# EAGLE board 184550 circle (EAGLE 5.10)
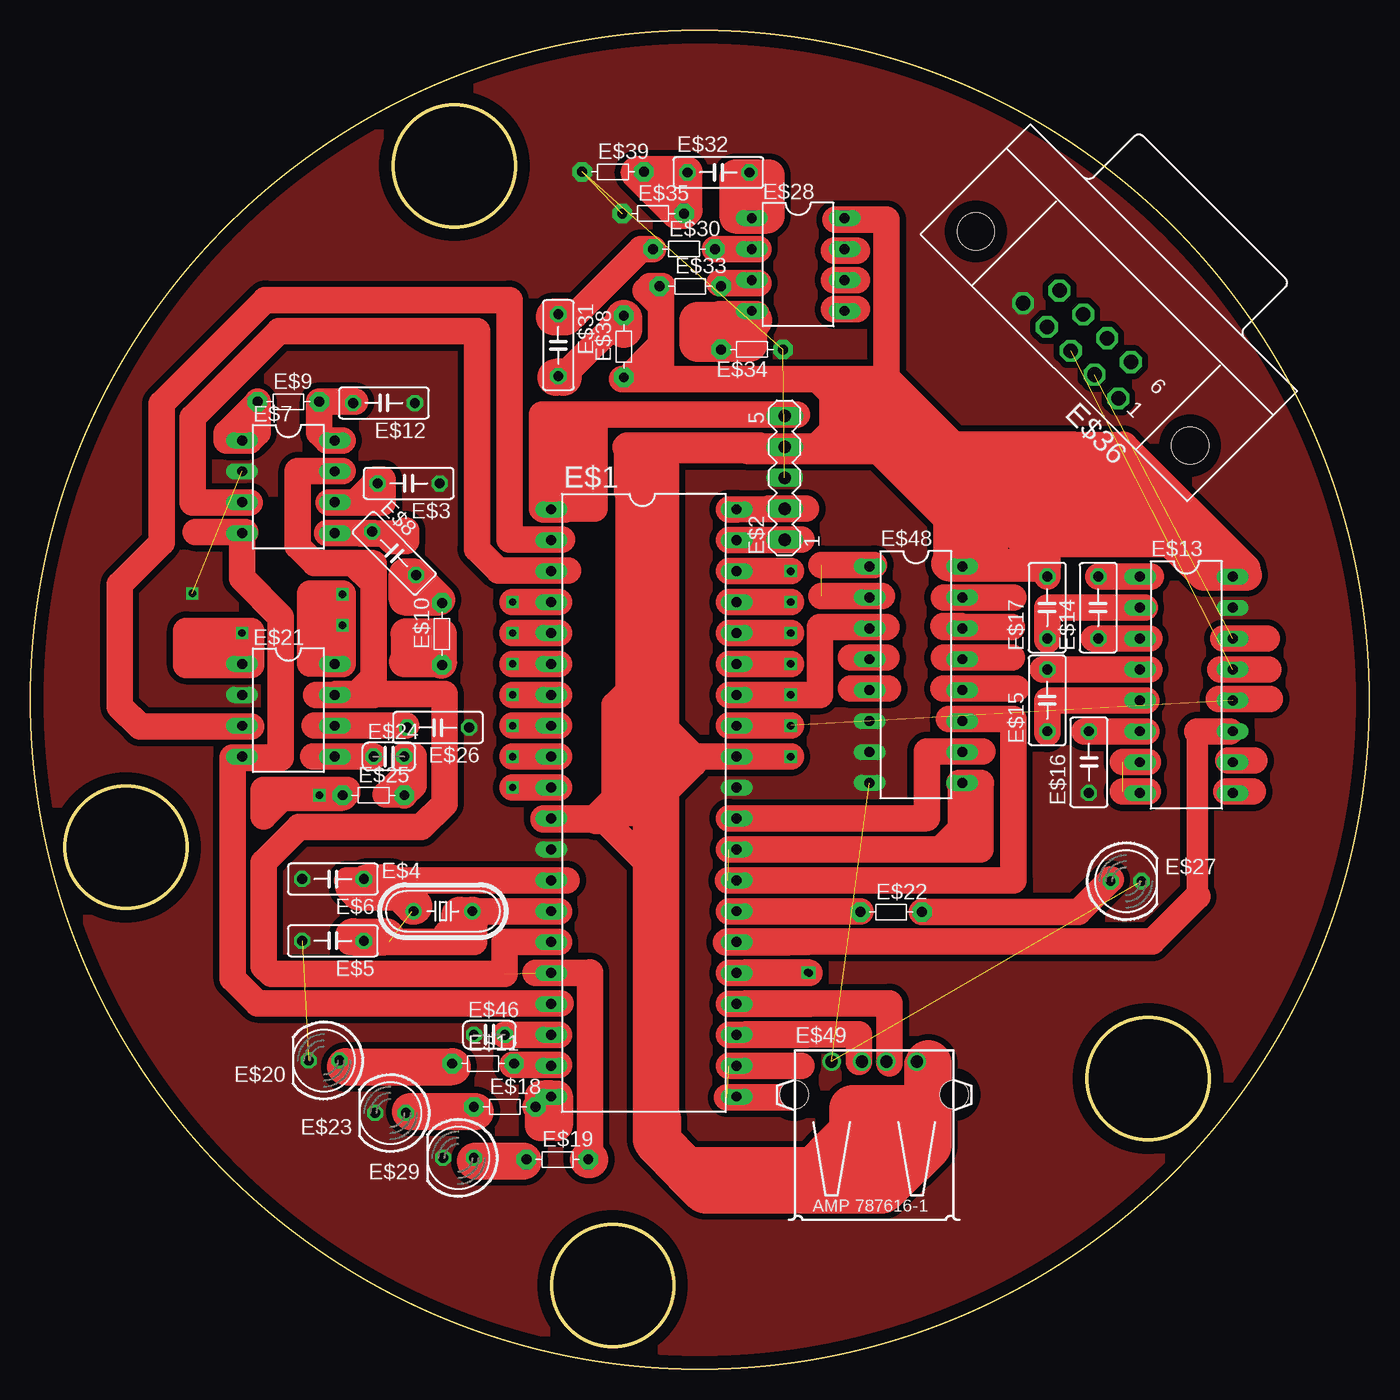
[diagram p0: board, top side]

Size 110 x 110 mm. Coordinates in mm from the lower left corner, seen from the top.
Outline: circle at 55,55 radius 55
Outline: circle at 47.84,6.87 radius 5
Outline: circle at 91.84,23.87 radius 5
Outline: circle at 34.84,98.87 radius 5
Outline: circle at 7.84,42.87 radius 5
Copper layers (1*16): Top 0.035mm / dielectric 1.5mm / Bottom 0.035mm
Design rules "default *": minimum track width 10mil, minimum drill 24mil, track to track 1mil, track to pad 1mil, pad to pad 1mil, via to via 1mil, smd to smd 1mil, copper to edge 40mil, drill to drill 8mil, minimum pad ring 10mil, minimum via ring 8mil, stop-mask expansion 4mil, vias tented up to drill 0mil, thermal gap 10mil

## Footprints (pad centres in the part's own frame; a part is rotated, then mirrored left to right if it is on the bottom)
DIL40 = drill 0.813 long: 1 -24.13,-7.62; 2 -21.59,-7.62; 3 -19.05,-7.62; 4 -16.51,-7.62; 5 -13.97,-7.62; 6 -11.43,-7.62; 7 -8.89,-7.62; 8 -6.35,-7.62; 9 -3.81,-7.62; 10 -1.27,-7.62; 11 1.27,-7.62; 12 3.81,-7.62; 13 6.35,-7.62; 14 8.89,-7.62; 15 11.43,-7.62; 16 13.97,-7.62; 17 16.51,-7.62; 18 19.05,-7.62; 19 21.59,-7.62; 20 24.13,-7.62; 21 24.13,7.62; 22 21.59,7.62; 23 19.05,7.62; 24 16.51,7.62; 25 13.97,7.62; 26 11.43,7.62; 27 8.89,7.62; 28 6.35,7.62; 29 3.81,7.62; 30 1.27,7.62; 31 -1.27,7.62; 32 -3.81,7.62; 33 -6.35,7.62; 34 -8.89,7.62; 35 -11.43,7.62; 36 -13.97,7.62; 37 -16.51,7.62; 38 -19.05,7.62; 39 -21.59,7.62; 40 -24.13,7.62
MA05-1 = drill 1.016 long: 1 -5.08,0; 2 -2.54,0; 3 0,0; 4 2.54,0; 5 5.08,0
C050-025X075 = drill 0.813 octagon: 1 -2.54,0; 2 2.54,0
HC49/S = drill 0.813 round: 1 -2.413,0; 2 2.413,0
DIL08 = drill 0.813 long: 1 -3.81,-3.81; 2 -1.27,-3.81; 3 1.27,-3.81; 4 3.81,-3.81; 5 3.81,3.81; 6 1.27,3.81; 7 -1.27,3.81; 8 -3.81,3.81
R-5 = drill 0.813 pad 1.6 octagon: 1 -2.54,0; 2 2.54,0
DIL16 = drill 0.813 long: 1 -8.89,-3.81; 2 -6.35,-3.81; 3 -3.81,-3.81; 4 -1.27,-3.81; 5 1.27,-3.81; 6 3.81,-3.81; 7 6.35,-3.81; 8 8.89,-3.81; 9 8.89,3.81; 10 6.35,3.81; 11 3.81,3.81; 12 1.27,3.81; 13 -1.27,3.81; 14 -3.81,3.81; 15 -6.35,3.81; 16 -8.89,3.81
C050-030X075 = drill 0.813 octagon: 1 -2.54,0; 2 2.54,0
LED5MM = drill 0.813 octagon: A -1.27,0; K 1.27,0
C025-024X044 = drill 0.813 octagon: 1 -1.27,0; 2 1.27,0
182-009-MALE = drill 1.194 pad 1.524 octagon: 1 -5.537,10.923; 2 -2.769,10.923; 3 0,10.923; 4 2.769,10.923; 5 5.537,10.923; 6 -4.153,8.08; 7 -1.384,8.08; 8 1.384,8.08; 9 4.153,8.08 | hole 3.048: -12.446,9.501; 12.446,9.501
USB = drill 1 round: 1 -3.5,12.99; 2 -1,12.99; 3 1,12.99; 4 3.5,12.99 | hole 2.3: -6.57,10.28; 6.57,10.28

## Placement (x,y rotation side)
E$1  [DIL40]  50.41,46.52 270 top
E$2  [MA05-1]  61.97,73.24 90 top
E$3  [C050-025X075]  31.08,72.78 180 top
E$4  [HC49/S]  33.9,37.63 0 top
E$5  [C050-025X075]  24.86,35.19 180 top
E$6  [C050-025X075]  24.86,40.27 180 top
E$7  [DIL08]  21.2,72.5 270 top
E$8  [C050-025X075]  29.89,67.04 315 top
E$9  [R-5]  21.2,79.49 0 top
E$10  [R-5]  33.82,60.41 90 top
E$11  [R-5]  37.2,25.1 0 top
E$12  [C050-025X075]  29.05,79.38 180 top
E$13  [DIL16]  94.99,56.22 270 top
E$14  [C050-030X075]  87.75,62.57 90 top
E$15  [C050-030X075]  83.56,54.95 90 top
E$16  [C050-030X075]  86.99,49.87 90 top
E$17  [C050-030X075]  83.56,62.57 90 top
E$18  [R-5]  38.98,21.55 0 top
E$19  [R-5]  43.3,17.23 0 top
E$20  [LED5MM]  24.12,25.36 180 top
E$21  [DIL08]  21.2,54.14 270 top
E$22  [R-5]  70.73,37.55 0 top
E$23  [LED5MM]  29.58,21.04 180 top
E$24  [C025-024X044]  29.45,50.33 0 top
E$25  [R-5]  28.18,47.15 0 top
E$26  [C050-025X075]  33.49,52.71 180 top
E$27  [LED5MM]  90.03,40.09 0 top
E$28  [DIL08]  63.08,90.76 270 top
E$29  [LED5MM]  35.17,17.36 180 top
E$30  [R-5]  53.71,92.03 0 top
E$31  [C050-025X075]  43.37,84.13 270 top
E$32  [C050-025X075]  56.53,98.33 0 top
E$33  [R-5]  54.22,88.98 0 top
E$34  [R-5]  59.3,83.78 180 top
E$35  [R-5]  51.17,94.95 0 top
E$36  [182-009-MALE]  93.21,91.4 135 top
E$38  [R-5]  48.76,84.03 90 top
E$39  [R-5]  47.87,98.38 0 top
E$46  [C025-024X044]  37.71,27.47 0 top
E$48  [DIL16]  72.76,57.06 270 top
E$49  [USB]  69.33,12.28 0 top

## Library data of the parts
E$1 = 74xx-eu
E$2 = con-lstb
E$3 E$5 E$6 E$8 E$12 E$14-E$17 E$24 E$26 E$31 E$32 E$46 = rcl
E$4 = crystal
E$7 E$13 E$21 E$28 E$48 = 40xx
E$9-E$11 E$18 E$19 E$22 E$25 E$30 E$33-E$35 E$38 E$39 = discrete
E$20 E$23 E$27 E$29 = led
E$36 = con-subd
E$49 = con-amp

## Nets
GND: E$1.12 E$1.31 E$2.3 E$3.1 E$5.2 E$6.2 E$7.2 E$12.1 E$13.15 E$16.1 E$20.K E$21.2 E$23.K E$26.1 E$27.K E$29.K E$34.1 E$35.1 E$36.5 E$39.1 E$46.1 E$48.6 E$48.7 E$48.8 E$49.1
S$3: E$1.39
S$4: E$1.40
S$7: E$9.1
S$13: E$7.8 E$9.2
S$30: E$24.1
S$31: E$24.2 E$25.2
S$32: E$21.8
S$35: E$1.23
S$36: E$1.24
S$39: E$1.33 E$13.12
S$46: E$25.1
S$59: E$14.2
S$75: E$22.2
S$84: E$11.1
S$96: E$19.2
S$97: E$18.2
S$116: E$35.2
S$121: E$30.1
S$126: E$30.2
S$127: E$34.2
S$141: E$7.4
S$150: E$13.14 E$36.2
S$151: E$13.13 E$36.3

## Tracks (layer width: path | path; a pad name or v marks a point on that pad's centre or on a via)
GND  (via drill 0.6)  (7 unrouted)
  other vias: 13.3,63.74
  pour Top (isolate 0.5, no thermals): -5.72,99.4 -3.31,101.81 8.88,101.81 38.85,131.78 123.56,131.78 128.64,126.7 128.64,21.93 122.55,15.83 99.43,15.83 81.65,-1.95 12.69,-1.95 10.79,-0.04 10.79,8.72 -3.82,23.33 -3.82,45.42
S$1
  Top 2.184: 42.15,70.65 43.93,70.65
S$2
  Top 2.184: 27.04,71.2 28.57,72.73 | 26.66,71.2 27.04,71.2 | 27.04,71.2 28.95,71.2 28.95,73.11 28.31,73.11 28.31,72.86 26.66,71.2 | 24.5,71.2 26.66,71.2
  Top 2.54: 28.57,72.73 28.57,72.86
S$3
  Top 2.184: 62.47,68.13 E$1.39 57.39,68.11
S$4
  Top 2.184: 62.47,70.67 E$1.40 57.39,70.65
S$5  (via drill 0.6)
  Top 2.184: 57.39,32.55 v64,32.55
S$6  (1 unrouted)
  Top 2.184: 31.36,40.17 44.06,40.17 | 31.36,40.17 31.36,37.63 | 31.36,40.17 29.2,40.17 28.18,40.17 26.03,40.17 | 26.28,35.09 29.45,35.09
S$7
  Top 2.184: 16.12,76.31 18.02,76.31 18.66,76.94 E$9.1
S$8  (1 unrouted)
  Top 2.184: 28.06,55.46 34.03,55.46 34.03,46.44 32.12,44.53 22.09,44.53 19.17,41.61 19.17,33.1 19.8,32.47 38.98,32.47 38.98,35.09 43.42,35.09 | 45.96,19.85 45.96,32.55 41.52,32.55
S$9  (via drill 0.6)
  Top 2.184: v39.61,63.03 43.42,63.03
S$10  (via drill 0.6)
  other vias: 25.64,61.12
S$11
  Top 2.184: 24.37,68.69 28.18,68.69
S$12
  Top 2.54: 31.87,58.25 33.77,58.25 | 31.87,58.25 30.85,58.25 30.85,60.41 33.77,60.41 33.77,58.12 | 33.77,58.12 33.77,58 | 31.87,58.25 30.72,58.12 30.85,58.12 | 30.85,58.12 33.77,58.12 | 30.85,58.12 30.98,58.25 30.98,58.76
S$13
  Top 2.184: 25.64,76.31 E$7.8 24.37,76.31 23.74,76.94 E$9.2 26.66,79.48
S$14  (via drill 0.6)
  other vias: 25.64,63.66
S$15
  Top 2.184: 28.18,35.09 36.44,35.09 36.44,37.63 43.42,37.63
S$16  (via drill 0.6)
  Top 2.184: v39.61,50.33 43.42,50.33
S$17
  Top 2.184: 44.19,65.62 38.47,65.62 36.69,67.4 36.69,85.3 20.44,85.3 13.33,78.19 13.33,71.2 18.02,71.2
S$18
  Top 2.184: 43.68,68.16 39.36,68.16 39.36,87.84 19.29,87.84 10.79,79.33 10.79,67.9 7.36,64.47 7.36,54.44 9.01,52.79 18.15,52.79
S$19  (via drill 0.6)
  Top 2.184: v39.61,60.49 43.42,60.49
S$20  (via drill 0.6)
  Top 2.184: v39.61,55.41 43.42,55.41
S$21  (via drill 0.6)
  Top 2.184: v39.61,52.87 43.42,52.87
S$22
  Top 2.184: 13.58,68.79 17.64,68.79
S$23
  Top 2.184: 42.03,70.7 42.03,78.44 62.98,78.44
S$24
  Top 2.184: 80.79,53.32 80.79,40.14 70.45,40.14
S$25
  Top 2.184: 18.15,58 18.15,60.66 12.82,60.66 12.82,58 | 12.82,58 17.52,58 17.52,59.39 13.2,59.39 | 12.82,58 12.82,57.87 18.15,57.87 18.15,58.38 18.02,58.38
S$26
  Top 2.184: 57.14,35.06 62.22,35.06
S$27  (1 unrouted)
  Top 2.184: 78.07,48.17 78.07,42.71 57.42,42.71 | 57.32,40.14 72.51,40.14
S$28
  Top 2.184: 23.36,52.87 30.85,52.87
S$29
  Top 2.184: 16.12,57.95 17.39,57.95 | 17.39,57.95 18.02,57.95 | 17.39,57.95 17.39,60.49
S$30
  Top 2.184: 23.23,50.33 E$24.1
S$31
  Top 2.184: E$25.2 30.72,47.2 | 30.72,47.2 E$24.2 | 30.72,47.2 31.49,47.96 31.49,50.38 30.72,50.38 30.72,49.49 30.85,49.36
S$32
  Top 2.184: 25.64,63.66 25.64,57.95 E$21.8 24.37,57.95
S$33
  Top 2.54: 31.11,63.2 33.27,63.2 | 31.11,63.2 31.11,65.36 | 33.27,63.2 31.11,65.36 | 33.27,63.2 33.65,63.2 31.49,65.36 31.11,65.36 | 31.11,63.2 30.72,63.2 30.72,65.36 30.98,65.36
S$34  (1 unrouted)
  Top 2.184: 57.39,24.93 63.36,24.93 | 57.24,22.31 62.32,22.31
S$35
  Top 2.184: 57.39,27.47 E$1.23 63.74,27.47
S$36
  Top 2.184: 57.39,30.01 E$1.24 64,30.01
S$37  (via drill 0.6)
  Top 2.184: v39.61,47.79 43.42,47.79
S$38  (via drill 0.6)
  Top 2.184: 57.39,65.57 v62.47,65.57
S$39  (via drill 0.6)  (1 unrouted)
  Top 2.184: 57.39,52.87 v62.47,52.87 E$1.33
S$40  (via drill 0.6)
  Top 2.184: 57.39,55.41 v62.47,55.41 64.89,55.41 64.89,60.99
S$41  (via drill 0.6)
  Top 2.184: 57.39,57.95 v62.47,57.95
S$42  (via drill 0.6)
  Top 2.184: 57.39,60.49 v62.47,60.49
S$43  (via drill 0.6)
  Top 2.184: 57.39,63.03 v62.47,63.03
S$44  (via drill 0.6)
  Top 2.184: 62.6,75.73 51.55,75.73 51.68,50.33 | 51.68,50.33 v62.47,50.33 | 51.68,50.33 46.6,45.25 42.15,45.25
S$45  (via drill 0.6)
  other vias: 17.39,60.49
S$46  (via drill 0.6)
  Top 2.54: v23.74,47.15 E$25.1
S$47
  Top 2.184: 76.32,48.17 78.1,48.17
S$48
  Top 2.184: 67.43,55.91 70.48,55.91
S$49
  Top 2.184: 27.17,68.66 29.07,68.66 29.71,68.03 30.85,68.03 30.85,68.92 30.6,68.66 29.2,68.66
S$50
  Top 2.184: 43.55,30.06 18.66,30.06 16.63,32.09 16.63,50.25 19.68,50.25
S$51
  Top 2.184: 26.03,47.33 26.03,47.58 24.37,47.58 | 21.33,47.58 19.17,47.58 19.17,45.42 20.69,46.95 | 20.69,46.95 21.33,47.58 | 21.33,47.58 24.37,47.58 | 24.37,47.58 25.01,46.95 20.69,46.95
S$52
  Top 2.184: 59.43,27.52 63.87,27.52
S$53  (via drill 0.6)
  Top 2.184: 58.79,32.6 v63.87,32.6
S$54
  Top 2.184: 59.43,30.06 63.87,30.06
S$55
  Top 2.184: 70.6,25.1 70.6,30.06 58.79,30.06
S$56
  Top 2.184: 68.06,25.23 68.06,27.52 58.79,27.52
S$57
  Top 2.54: 76.32,66.12 83.3,66.12 83.43,66 75.43,66 75.3,66.12
S$58
  Top 2.184: 72.13,18.5 72.13,18.63
S$59
  Top 2.184: E$14.2 92.07,65.11
S$60
  Top 2.184: 87.37,60.03 91.94,60.03
S$61
  Top 2.184: 83.18,57.49 91.94,57.49
S$62
  Top 2.184: 91.69,54.95 83.56,54.95 83.56,52.28
S$63
  Top 2.184: 86.6,52.41 91.69,52.41
S$64
  Top 2.184: 91.56,62.57 83.56,62.57 83.56,59.9
S$65
  Top 2.184: 72.89,25.1 72.89,17.1 52.19,17.1
S$66
  Top 2.184: 48.89,75.78 62.6,75.78
S$67
  Top 2.184: 97.78,57.49 101.72,57.49
S$68
  Top 2.184: 101.84,55.08 97.65,55.08
S$69
  Top 2.184: 98.03,60.03 101.59,60.03
S$70
  Top 2.184: 98.42,50 100.57,50
S$71
  Top 2.184: 97.65,65.11 97.65,67.78 83.56,67.78 83.56,65.11
S$72
  Top 3.81: 72.38,16.98 73.78,18.37 73.78,25.1
S$73
  Top 2.184: 60.14,35.09 63.8,35.09
S$74
  Top 2.184: 39.61,24.98 43.42,24.98
S$75
  Top 2.184: E$22.2 86.1,37.55 88.76,40.22
S$76
  Top 2.184: 76.19,55.91 81.02,55.91
S$77
  Top 2.54: 99.94,65.24 96.38,65.24 93.46,68.16
S$78
  Top 2.184: 76.44,61.04 75.02,61.04
S$79
  Top 2.184: 50.79,41.49 50.79,19.52 53.84,16.34 52.95,17.36 | 50.79,41.49 50.79,48.09 | 47.23,45.04 46.47,45.04 | 50.79,41.49 47.23,45.04 | 47.23,45.04 47.11,45.17 46.22,45.17 | 46.22,45.17 42.15,45.17 | 46.22,45.17 48,46.95 48,54.57 49.39,55.96 49.39,55.46 54.47,50.38 54.47,49.74 51.55,46.82
  Top 3.81: 51.43,20.66 51.43,74.13 | 51.43,20.66 51.43,18.88 53.84,16.34 | 53.84,16.34 64.63,16.34 | 64.63,16.34 72.38,17.48 72.38,17.1 69.97,14.69 55.49,14.69 53.84,16.34 | 53.84,16.34 51.55,18.63 51.55,20.53 51.43,20.66 | 67.56,19.52 73.14,20.28 | 67.56,19.52 63.24,15.2 64.63,16.34 | 72.38,21.42 67.56,21.42 67.56,19.52
S$80
  Top 2.184: 76.5,55.94 75.02,55.91
S$81
  Top 2.184: 16.14,76.36 16.14,76.92 18.63,79.41
S$82  (via drill 0.6)
  Top 2.184: 57.39,37.63 v68.19,37.63
S$83
  Top 2.184: 16.75,50.2 20.56,50.2 20.56,61.81 17.39,64.98
S$84
  Top 2.184: 25.77,25.1 E$11.1
S$85
  Top 2.184: 38.98,27.47 43.42,27.47
S$86  (via drill 0.6)
  other vias: 39.74,25.1
S$87  (1 unrouted)
  Top 2.184: 89.78,49.87 91.81,49.87 | 89.78,47.46 91.81,47.46
S$88
  Top 1.778: 95.88,38.82 95.88,52.41
  Top 2.184: 57.27,35.14 92.19,35.14 95.88,38.82 | 95.88,52.41 98.54,52.41
S$89  (via drill 0.6)
  Top 2.184: v39.61,57.95 43.42,57.95
S$90
  Top 2.184: 57.39,45.25 73.45,45.25
S$91
  Top 2.184: 30.98,21.29 36.57,21.29
S$92
  Top 2.184: 42.28,75.78 46.35,75.78
S$93
  Top 2.184: 65.01,60.99 70.35,60.99
S$94
  Top 2.184: 46.35,76.67 46.35,75.9 | 43.42,76.67 46.35,76.67 | 46.35,76.67 46.35,77.43
S$95
  Top 2.184: 97.78,65.11 99.43,65.11
S$96
  Top 2.184: 45.96,16.98 45.96,17.23 45.96,32.6
  Top 3.048: E$19.2 45.96,17.23
S$97
  Top 2.184: 43.3,22.44 43.42,22.44 | 42.15,22.44 42.03,22.44 42.03,20.02 | E$18.2 42.92,22.44
  Top 2.54: 42.15,22.44 42.92,22.44 43.3,22.44 43.3,20.02 41.9,20.02 41.9,22.44
S$98
  Top 2.184: 36.69,17.23 40.88,17.23
S$99
  Top 2.184: 75.18,66.33 78.22,66.33
S$100
  Top 2.184: 30.47,47.2 29.2,47.2 30.47,48.47
S$101
  Top 2.184: 51.68,50.33 62.47,50.33
S$102
  Top 2.184: 75.05,60.99 80.64,60.99
S$103
  Top 2.184: 67.43,58.45 70.35,58.45
S$104  (1 unrouted)
  Top 2.184: 65.01,66.07 69.33,66.07 | 65.01,63.53 69.97,63.53
S$105
  Top 2.184: 75.05,63.41 80.76,63.41
S$106
  Top 2.184: 75.05,58.45 80.64,58.45
S$107
  Top 2.54: 99.81,65.74 89.78,75.78 85.72,75.78 | 85.72,75.78 68.32,75.78 | 85.72,75.78 92.19,69.3 94.61,69.3 90.16,73.75 88.89,73.75 88.51,74.13 77.08,74.13 81.78,69.43 89.91,69.43 87.11,72.22 85.59,72.22 85.46,72.35 80.89,72.35 82.03,71.2 82.79,71.2 82.92,71.08 86.73,71.08
S$108
  Top 2.54: 75.3,66.25 75.43,66.38 75.43,74.25 | 58.79,75.65 74.03,75.65 75.43,74.25 | 79.11,70.57 82.29,67.4 | 75.43,74.25 79.11,70.57 | 79.11,70.57 79.11,67.78 76.83,67.78 76.95,67.9 76.95,69.94
S$109
  Top 2.184: 98.29,47.46 100.45,47.46
S$110
  Top 2.184: 49.14,50 49.14,75.27 51.68,75.27 51.68,75.52 59.93,75.52 59.93,75.9 49.01,75.9 49.01,72.09 49.65,72.09
S$111
  Top 2.184: 75.48,53.4 80.79,53.4
S$112
  Top 2.184: 78.22,50.76 73.65,50.76 73.65,45.3
S$113
  Top 1.27: 56.25,91.91 59.43,91.91
S$114
  Top 2.184: 61.33,68.16 63.36,68.16
S$115  (2 unrouted)
  Top 2.184: 66.03,87.08 67.94,87.08 | 66.03,89.49 67.94,89.49 | 66.03,91.91 67.94,91.91
S$116
  Top 2.54: E$35.2 53.71,95.08 | 53.71,95.08 53.71,98.13 53.97,98.38 | 53.97,98.38 50.41,98.38 | 50.41,98.38 49.77,98.38 | 53.71,95.08 50.41,98.38 | 53.71,95.08 53.08,95.08 49.77,98.38 | 49.77,98.38 49.77,98.26 53.08,94.95 E$35.2 | E$35.2 53.97,95.21 53.97,98.38
S$117
  Top 1.27: 59.55,89.49 57.27,89.49 56.63,88.86
S$118
  Top 1.27: 56.51,86.57 56.51,86.95 59.55,86.95
S$119
  Top 1.27: 59.17,98.26 59.05,98.26
  Top 2.184: 59.17,98.26 59.17,94.57 59.3,94.45 | 59.3,94.45 60.06,94.45 | 59.3,94.45 58.41,94.45 58.28,94.57
S$120
  Top 2.54: 60.7,94.7 60.7,98.13 57.9,98.13 57.9,94.57 60.57,94.57
S$121
  Top 2.184: 43.42,86.57 43.68,86.57 44.7,86.57 50.16,92.03 E$30.1
  Top 2.54: 43.68,86.57 43.3,86.57 43.17,86.44
S$122
  Top 1.27: 66.28,94.57 70.6,94.57
S$123
  Top 2.184: 49.01,81.37 48.63,81.37 | 49.01,81.37 52.31,81.37 | 49.01,81.37 51.43,83.78
S$124
  Top 2.184: 56.63,86.7 59.68,86.7
S$125
  Top 2.184: 56.63,89.24 59.81,89.24
S$126
  Top 2.184: 59.81,92.03 E$30.2
S$127
  Top 2.184: E$34.2 56.76,86.32
S$128
  Top 2.184: 51.93,88.98 50.92,88.98 50.54,88.6 51.81,87.33 | 51.81,87.33 51.81,88.98 | 51.81,81.49 51.81,87.33
S$129
  Top 2.184: 25.64,73.77 21.96,73.77 21.96,67.65 23.36,66.25 26.53,66.25 | 26.53,66.25 28.06,66.25 28.06,66.12 28.18,66 | 28.18,56.85 28.18,55.41 23.49,55.41 | 28.18,64.6 28.18,66 | 28.18,66 28.18,66.2 | 25.14,55.46 26.79,55.46 28.18,56.85 | 28.18,56.85 28.18,64.6 | 28.18,64.6 26.53,66.25
S$130
  Top 2.184: 60.7,70.7 63.74,70.7
S$131
  Top 2.184: 65.9,76.03 65.9,81.24 67.68,81.24 69.08,79.84 69.08,77.05 68.95,76.92 68.57,76.92 67.81,77.68 67.81,79.33 67.68,79.46
S$132
  Top 2.184: 67.43,78.7 67.3,78.7 64.76,81.24
S$133
  Top 2.184: 67.17,77.94 66.67,77.94 64.25,75.52
S$134
  Top 2.184: 79.87,75.65 74.03,75.65 70.48,79.21
S$135
  Top 2.184: 43.42,81.62 43.81,81.62 48.89,86.7
S$136
  Top 3.048: 43.81,81.49 43.17,81.49
S$137
  Top 3.048: 43.93,86.44 43.04,86.44
S$138
  Top 3.048: 48.76,85.43 48.76,86.32
S$139
  Top 3.048: 58.54,86.19 54.85,86.19 54.85,84.29 59.05,84.29 59.05,85.81 59.43,86.19
S$140
  Top 2.184: 70.35,81.37 70.35,76.41 | 70.35,81.37 70.35,94.45 66.16,94.45 | 70.35,81.37 70.09,81.37 51.81,81.37
  Top 2.54: 67.17,76.41 68.95,76.41 76.06,69.3 76.06,70.19 76.44,70.57 76.32,70.57 72.25,74.63 71.87,74.63 68.32,78.19 68.32,80.22 68.44,80.35 69.08,80.35 70.09,81.37 70.22,81.37 78.73,72.86
S$141
  Top 2.184: 17.39,65.03 E$7.4
S$142
  Top 2.184: 24.37,58.12 24.37,63.71 25.64,63.71
S$143
  Top 3.048: 31.23,21.17 36.57,21.17
S$144
  Top 3.048: 36.57,17.1 40.5,17.1
S$145
  Top 3.048: 25.9,24.85 34.66,24.85
S$146
  Top 3.048: 30.72,39.2 27.04,39.2 26.53,39.71
S$147
  Top 3.048: 26.53,35.52 29.2,35.52
S$148
  Top 3.048: 27.68,39.96 29.58,39.96 31.49,38.06
S$149
  Top 3.048: 36.31,37.3 35.3,37.3 35.3,36.28 34.53,35.52
S$150  (1 unrouted)
S$151  (1 unrouted)
S$152
  Top 2.184: 76.44,47.71 76.44,44.41 74.92,42.88
S$153
  Top 2.184: 43.04,70.7 46.35,70.7 46.35,77.56 44.57,77.56 44.57,72.22 43.68,72.22 43.68,74.25
S$154
  Top 2.184: 25.01,58 22.98,58 22.98,63.71 24.88,63.71 24.88,63.58
(copper drawn outside any net)
  shapes: Top area x1

## Text on the board
Unrouted: 4.7UF | VCC | OUTA | INA- | OUTB | 1K | 0.1UF | INA+ | INB- | 10K | GND | INB+ | 10K | VDD | CLK | VSS | RSET | OUT | GND | STROBE | MCLR | PGD | IN | RA0 | PGC | Q4 | VDD | RA1 | RB5 | 1 | 16 | + | RA2 | RB4 | Q6 | Q2 | 1uf | 2 | 15 | IN | Q1 | RA3 | RB3 | 3 | 14 | VDD | CLK | RA4 | RB2 | Q7 | Q0 | Q0 | 4 | 13 | Q5 | Q3 | tx | VSS | RSET | RA5 | RB1 | SCL | 5 | 12 | 1uf | INH | C1 | OUT | GND | RE0 | RB0 | SDI | 6 | 11 | STROBE | IN | RE1 | VDD | VEE | 1uf | 10 | 7 | VSS | RE2 | VSS | + | 8 | 9 | C2 | C3 | VDD | RD7 | 22pf | VSS | RD6 | 20mhz | OSC1 | RD5 | 22pf | OSC2 | RD4 | RC0 | RC7 | SDO | RC1 | RC6 | VBUS | RC2 | D+ | green | D+ | VUSB | D- | D- | white | RD0 | RD0 | RD3 | RD1 | RD1 | RD2